# Altium PCB Brain_Stim_Main.PcbDoc (part 2 of 2)
Units mil, origin at the board's own origin, x right, y up, seen from the top; angles counter-clockwise.
Board outline 3955.03 x 5620.03 mil, 4 copper layers (Top Layer, Internal 1, Internal 2, Bottom Layer), stack 23.756 mil thick; 133 components, 111 nets, 539 pads, 126 vias.
Unrouted connection lines stored in the file: 299.
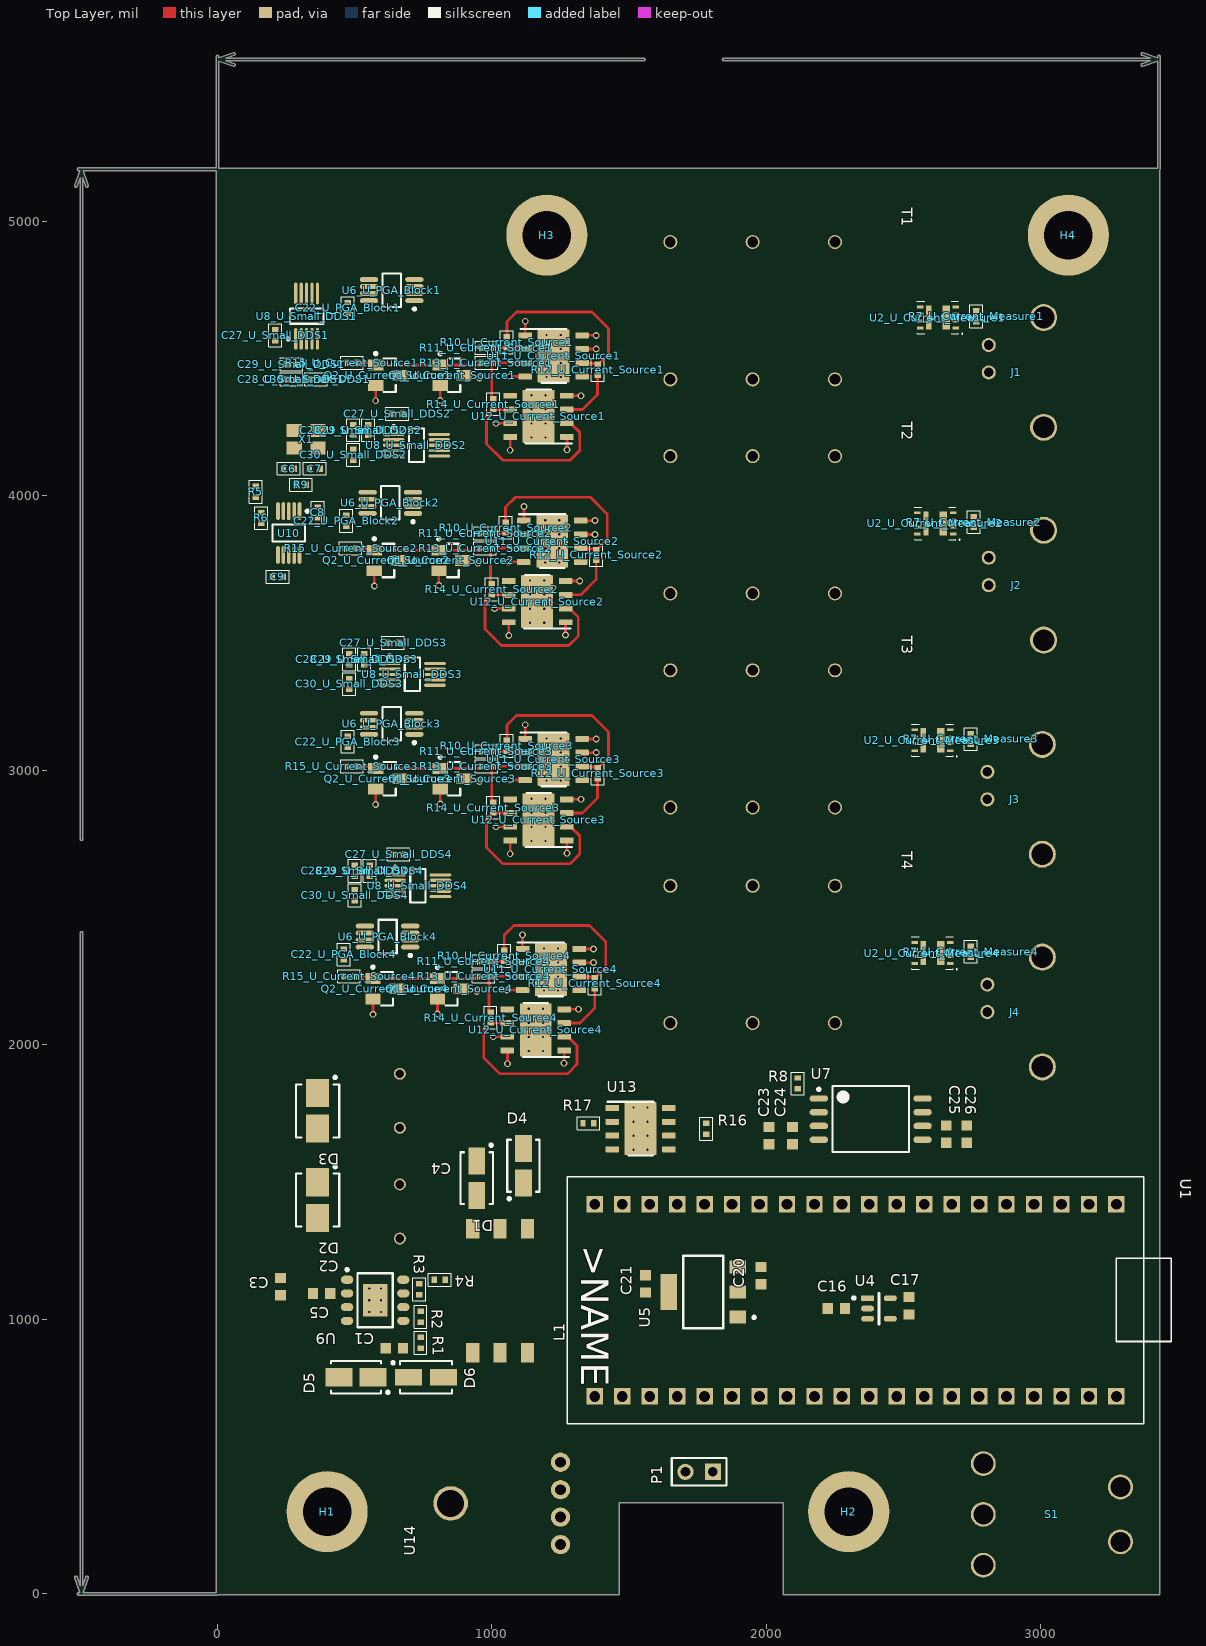
[diagram p0: Top Layer view]

## Via types
v1: diameter 25, hole 15, Top Layer to Bottom Layer, 48 vias
v2: diameter 19.68, hole 7.87, Top Layer to Bottom Layer, 42 vias
v3: diameter 19.68, hole 7.87, Top Layer to Bottom Layer, tented both sides, 36 vias

## Nets (pads, with @x,y where several pads share a name; then routed paths per layer and width w, separated by ;. In a path a pad name is that pad's centre, name@x,y a point inside that pad or via, vN(x,y) a via of type N, cw(c..) or ccw(c..) an arc to the next point about the centre after c; other vN are vias at no path point) (continued)
pads on no net: H1.M4 H2.M4 H3.M4 H4.M4 L1.2 T1.2 T1.5 T2.2 T2.5 T3.2 T3.5 T4.2 T4.5 U1.3V3 U1.3V3_EN U1.ADC_VREF U1.AGND U1.GND U1.GND2 U1.GND3 U1.GND4 U1.GND5 U1.GND6 U1.GND7 U1.GP0 U1.GP1 U1.GP2 U1.GP3 U1.GP4 U1.GP5 U1.GP6 U1.GP7 U1.GP10 U1.GP11 U1.GP12 U1.GP13 U1.GP14 U1.GP15 U1.GP17 U1.GP20 U1.GP21 U1.GP22 U1.GP26_A0 U1.GP27_A1 U1.GP28_A2 U1.RUN U1.VBUS U1.VSYS U4.4 U10.6 U10.9 U11_U_Current_Source1.5 U11_U_Current_Source1.9@1225,4510 U11_U_Current_Source2.5 U11_U_Current_Source2.9@1220,3835 U11_U_Current_Source3.5 U11_U_Current_Source3.9@1225,3040 U11_U_Current_Source4.5 U11_U_Current_Source4.9@1215,2275 U12_U_Current_Source1.5 U12_U_Current_Source1.9@1170,4290 U12_U_Current_Source2.5 U12_U_Current_Source2.9@1165,3615 U12_U_Current_Source3.5 U12_U_Current_Source3.9@1170,2820 U12_U_Current_Source4.5 U12_U_Current_Source4.9@1160,2055 U13.5 U13.9@1541.65,1695 U14.EN U14.GND U14.M1 U14.V+ U14.VIN

## Silkscreen, mask and mechanical layers (free items; w line width, h text height)
Mechanical 1:
  lines w7.01: 0,0 1460,0 1460,335 2065,335 2065,0 3430,0 3430,5190 0,5190 0,0

## Dimensions
0,5190 to 3430,5190 on Mechanical 15
0,0 to 0,5190 on Mechanical 15

## Text inside footprints (layer, text, board x,y; h text height)
U1: Top Overlay ">NAME" at 1325,1270 h100 r270